# Altium PCB PCB_2021-08-05_00-26-25_2021-08-28_22-46-04.pcbdoc
Units mil, origin at the board's own origin, x right, y up, seen from the top; angles counter-clockwise.
Board outline 2978.51 x 3005 mil, 2 copper layers (Top Layer, Bottom Layer); 27 components, 45 nets, 177 pads, 71 vias.
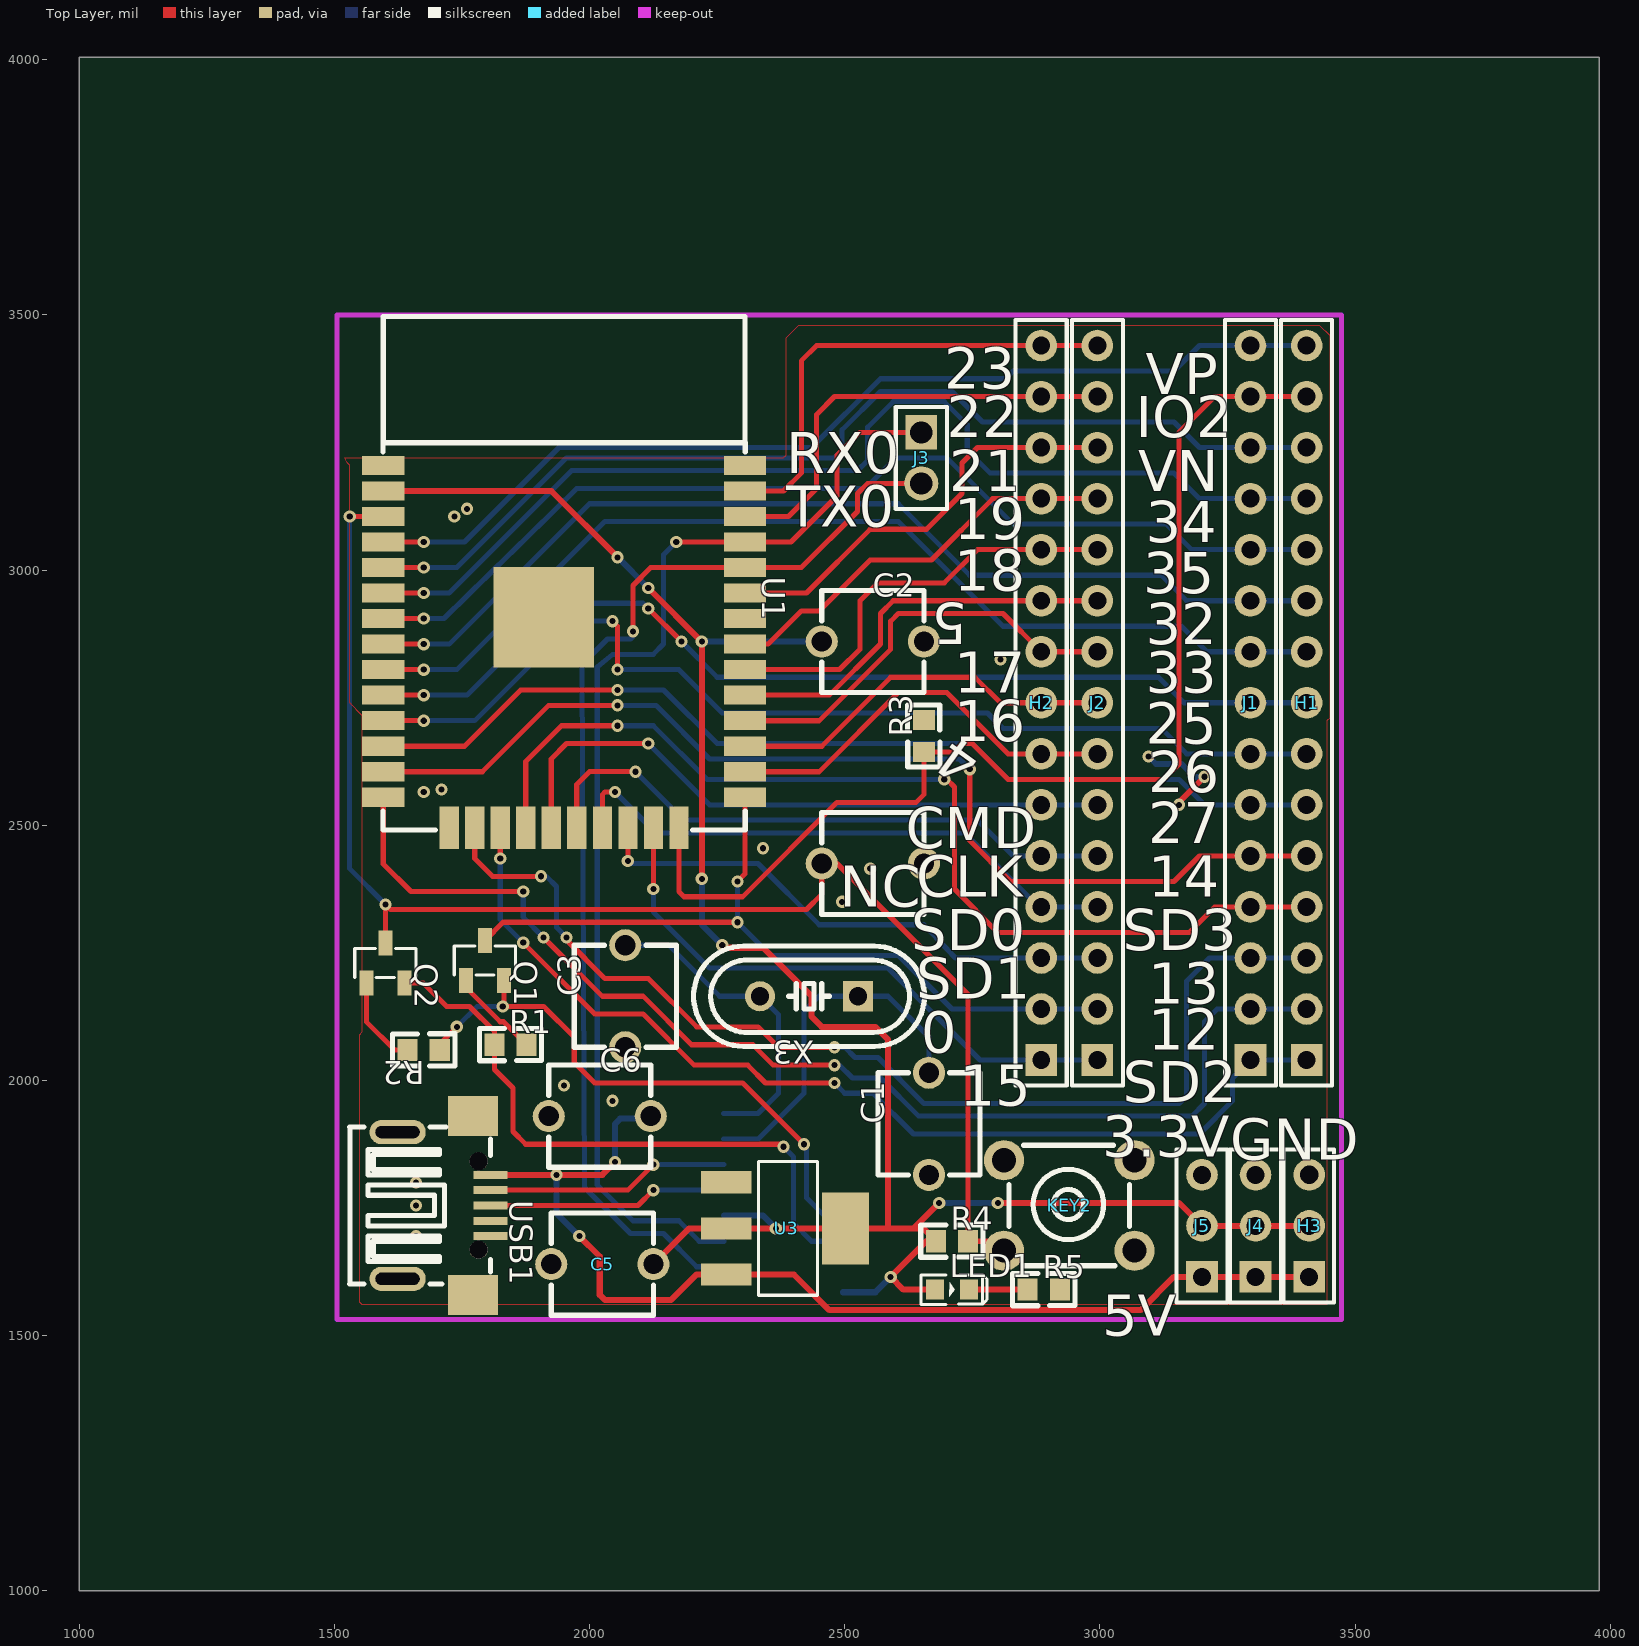
[diagram p0: Top Layer view]
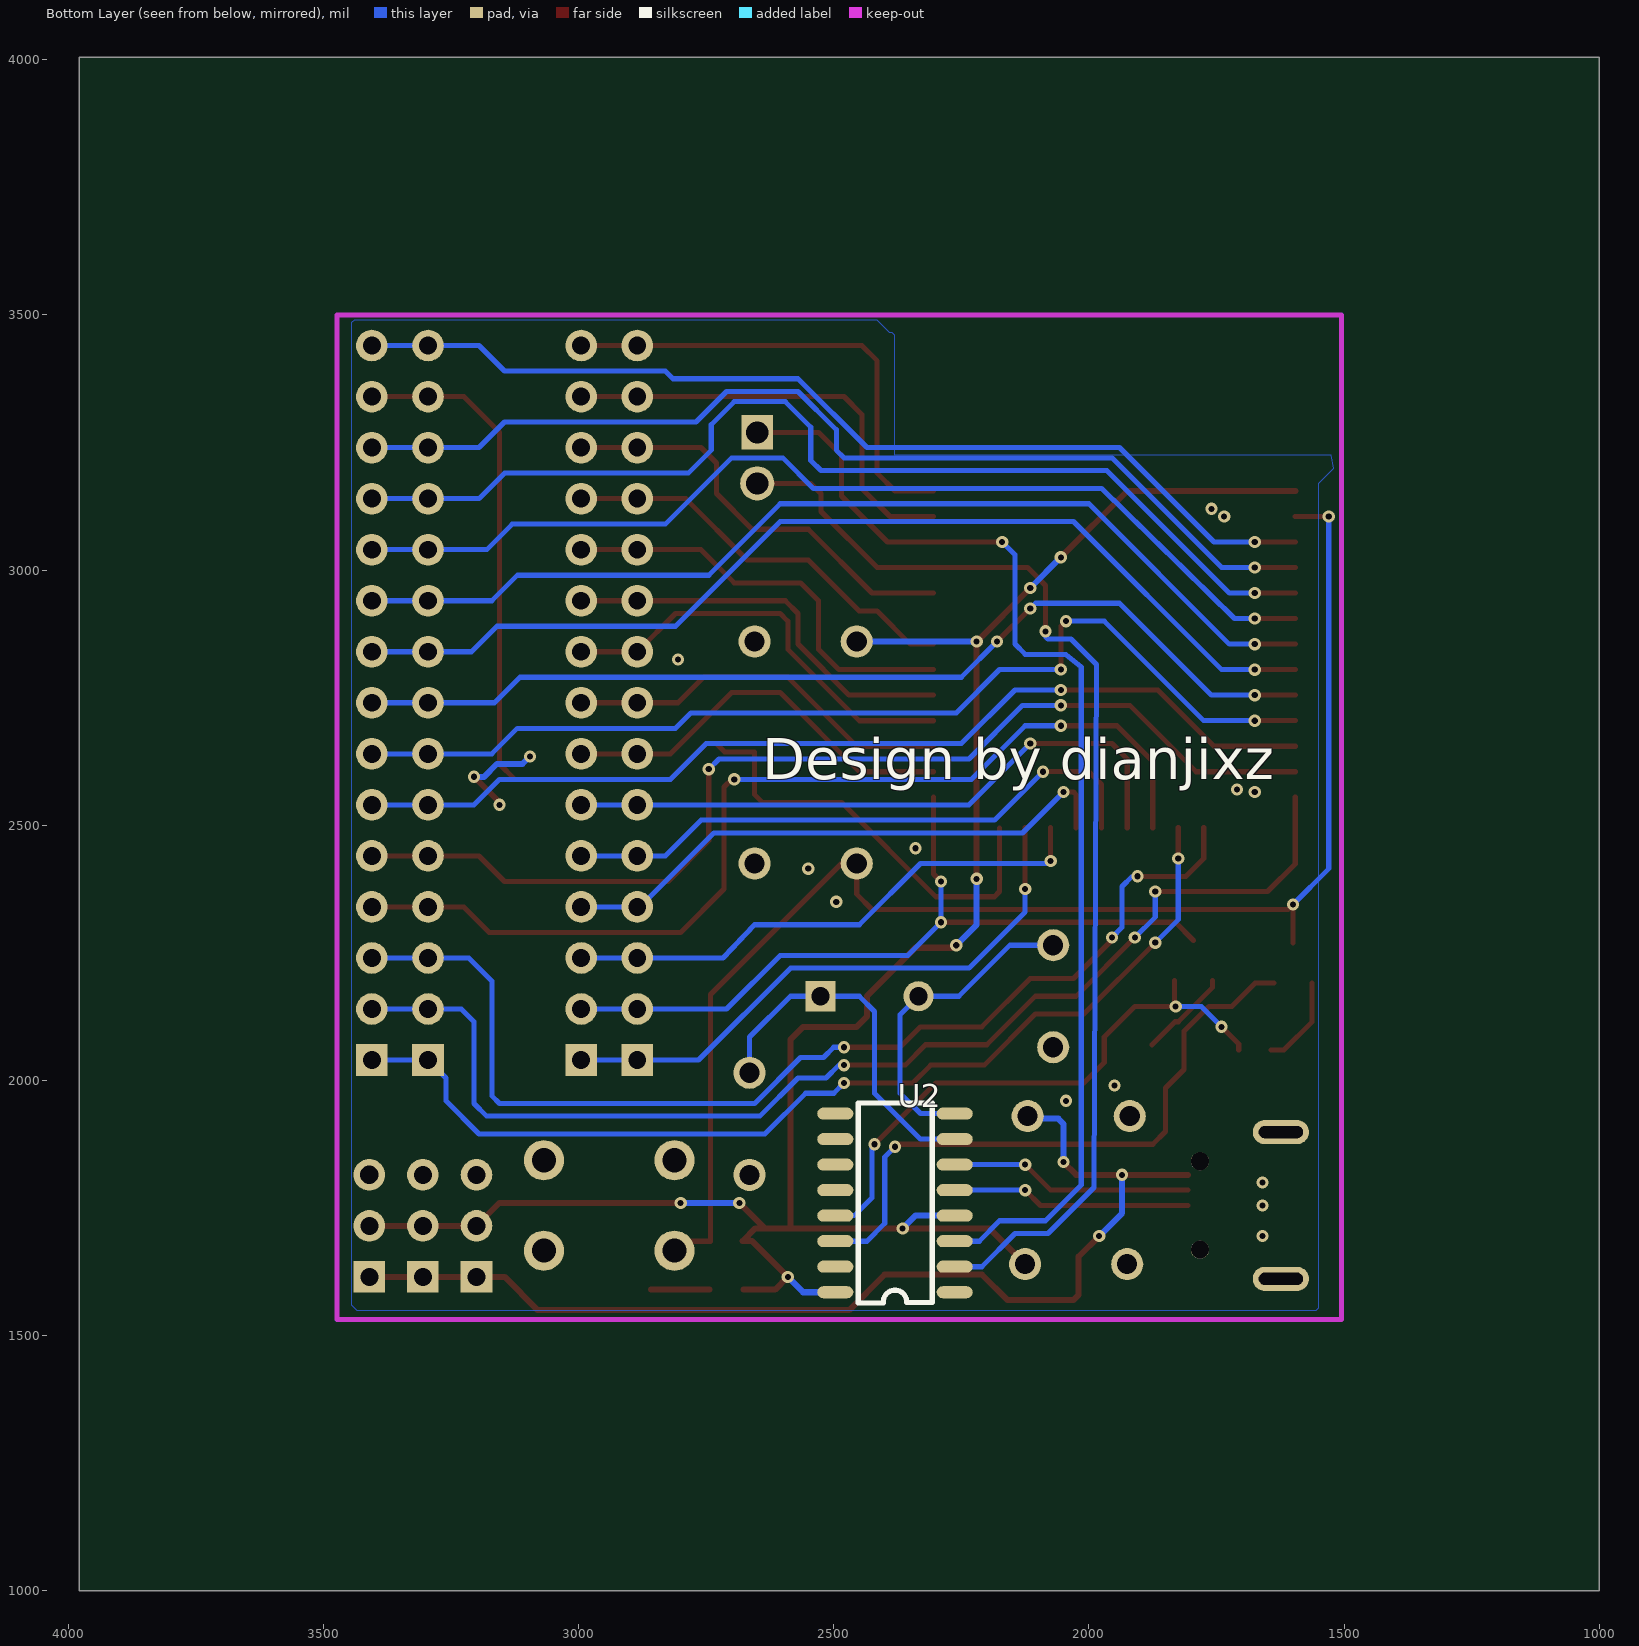
[diagram p1: Bottom Layer view, seen from below]

## Layer stack, top to bottom
Top Layer: signal copper (thickness not stored)
Dielectric: dielectric 12.6, FR-4, Dk 4.8
Bottom Layer: signal copper (thickness not stored)

## Board outline
3978.51,1000 1000,1000 1000,4005 3978.51,4005

## Components (designator, comment, footprint, x,y, rotation, side; value= is the part's Value field where it differs from the comment)
C1 "22pf" CAP-TH_L5.0-W5.0-P5.08-D1.0-L 2665,1915 r90 top
C2 "100nf" CAP-TH_L5.0-W5.0-P5.08-D1.0-L 2555,2860 r0 top
C3 "22pf" CAP-TH_L5.0-W5.0-P5.08-D1.0-L 2070,2165 r90 top
C5 "10uf" CAP-TH_L5.0-W5.0-P5.08-D1.0-L 2025,1640 r180 top
C6 "10uf" CAP-TH_L5.0-W5.0-P5.08-D1.0-L 2020,1930 r0 top
H1 "HDR-F-2.54_1x15" HDR-F-2.54_1X15 3405,2740 r90 top
H2 "HDR-F-2.54_1x15" HDR-F-2.54_1X15 2885,2740 r90 top
H3 "HDR-F-2.54_1x3" HDR-F-2.54_1X3 3410,1715 r90 top
J1 "HDR-M-2.54_1x15" HDR-M-2.54_1X15 3295,2740 r90 top
J2 "HDR-M-2.54_1x15" HDR-M-2.54_1X15 2995,2740 r90 top
J3 "HDR-M-2.54_1x2" HDR-M-2.54_1X2 2650,3220 r270 top
J4 "HDR-M-2.54_1x3" HDR-M-2.54_1X3 3305,1715 r90 top
J5 "HDR-M-2.54_1x3" HDR-M-2.54_1X3 3200,1715 r90 top
KEY2 "K2-6639DP-B4SW-04" KEY-TH_4P-L6.0-W6.0-P4.50-LS7.5 2940,1755 r0 top
LED1 "LED-0603_R" LED0603_RED 2710,1590 r0 top
Q1 "S8050" SOT-23-3_L2.9-W1.3-P1.90-LS2.4-BR 1795,2235 r270 top
Q2 "S8050" SOT-23-3_L2.9-W1.3-P1.90-LS2.4-BR 1600,2230 r270 top
R1 "12k" R0603 1845,2070 r0 top
R2 "12k" R0603 1675,2060 r180 top
R3 "10k" R0603 2655,2675 r90 top
R4 "12k" R0603 2710,1685 r0 top
R5 "100" R0603 2890,1590 r0 top
U1 "ESP32-WROOM-32D" WIFIM-SMD_39P-L25.5-W18.0-P1.27-BL 1950,2850 r270 top
U2 "CH340G" SOIC-16_L9.9-W3.9-P1.27-LS6.0-BR 2380,1760 r0 bottom
U3 "AMS1117-3.3" SOT-223-3_L6.5-W3.4-P2.30-LS7.0-BR 2385,1710 r180 top
USB1 "U-M-M5DS-W-5" USB-SMD_U-M-M5DS-W-5 1715,1755 r270 top
X3 "12MHz" HC-49US_L11.5-W4.5-P4.88 2430,2165 r180 top

## Footprints (in the part's own frame and the unit in brackets; to place one, negate y for a bottom-side part, rotate by r counter-clockwise, add the part's x,y. Pads: shape width x height; smd on the part's side, far side on the other; paste and mask are expansions set on the pad)
CAP-TH_L5.0-W5.0-P5.08-D1.0-L [mm]
  round 1.6 hole 1: 1(-2.54,0) 2(2.54,0)
  silkscreen extent -2.54,-2.54 2.54,2.54
HC-49US_L11.5-W4.5-P4.88 [mm]
  rect 1.5x1.5 hole 0.9: 1(-2.44,0)
  round 1.5 hole 0.9: 2(2.44,0)
  silkscreen extent -5.74,-2.5 5.74,2.5
HDR-F-2.54_1X3 [mil]
  rect 62x62 hole 35: 1(-100,0)
  round 62 hole 35: 2(0,0)
  round 62 hole 36: 3(100,0)
  silkscreen extent -150,-49 150,50
HDR-F-2.54_1X15 [mil]
  rect 62x62 hole 35: 1(-700,0)
  round 62 hole 35: 2(-600,0) 3(-500,0) 4(-400,0) 5(-300,0) 6(-200,0) 7(-100,0) 8(0,0) 9(100,0) 10(200,0) 11(300,0) 12(400,0) 13(500,0) 14(600,0) 15(700,0)
  silkscreen extent -750,-50 750,50
HDR-M-2.54_1X2 [mm]
  rect 1.7x1.575 hole 1.1: 1(-1.27,0)
  round 1.7 hole 1.1: 2(1.27,0)
  silkscreen extent -2.54,-1.27 2.54,1.27
HDR-M-2.54_1X3 [mil]
  rect 62x62 hole 35: 1(-100,0)
  round 62 hole 35: 2(0,0) 3(100,0)
  silkscreen extent -150,-50 150,50
HDR-M-2.54_1X15 [mil]
  rect 62x62 hole 35: 1(-700,0)
  round 62 hole 35: 2(-600,0) 3(-500,0) 4(-400,0) 5(-300,0) 6(-200,0) 7(-100,0) 8(0,0) 9(100,0) 10(200,0) 11(300,0) 12(400,0) 13(500,0) 14(600,0) 15(700,0)
  silkscreen extent -750,-50 750,50
KEY-TH_4P-L6.0-W6.0-P4.50-LS7.5 [mm]
  round 2 hole 1.2: 1(-3.25,-2.25) 2(3.25,-2.25) 3(3.25,2.25) 4(-3.25,2.25)
  silkscreen extent -3,-3 3,3
LED0603_RED [mm]
  rect 0.9x1 smd: 1(-0.85,0) 2(0.85,0)
  silkscreen extent -1.54,-0.73 1.75,0.73
R0603 [mm]
  rect 1x1.1 smd: 1(-0.8,0) 2(0.8,0)
  silkscreen extent -1.55,-0.8 1.55,0.81
SOIC-16_L9.9-W3.9-P1.27-LS6.0-BR [mil]
  oval 70.79x23.62 smd: 1(-117,175) 2(-117,125) 3(-117,75) 4(-117,25) 5(-117,-25) 6(-117,-75) 7(-117,-125) 8(-117,-175) 9(117,-175) 10(117,-125) 11(117,-75) 12(117,-25) 13(117,25) 14(117,75) 15(117,125) 16(117,175)
  silkscreen extent -73,-196 72,196
SOT-23-3_L2.9-W1.3-P1.90-LS2.4-BR [mm]
  rect 1.25x0.7 smd: 1(1,-0.95) 2(1,0.95) 3(-1,0)
  silkscreen extent -0.73,-1.53 0.73,1.53
SOT-223-3_L6.5-W3.4-P2.30-LS7.0-BR [mm]
  rect 2.5x1.1 smd: 1(2.97,-2.3) 2(2.97,0) 3(2.97,2.3)
  rect 2.34x3.6 smd: 4(-2.97,0)
  silkscreen extent -1.57,-3.33 1.37,3.33
USB-SMD_U-M-M5DS-W-5 [mil]
  rect 15.74x66.93 smd: 1(-60,91.14) 2(-30,91.14) 3(0,91.14) 4(30,91.14) 5(60,91.14)
  rect 78.74x98.43 smd: 6(-175.2,56.51) 7(175.2,56.51)
  oval 47.24x110.24 hole 23.62 slot 86.62 at 90 deg copper offset 0,-0.02: 8(-143.7,-91.13) 9(143.7,-91.12)
  round 35.43 hole 35.43 unplated: ""(-86.6,67.56) ""(86.6,67.56)
  silkscreen extent -154,-185 154,91
WIFIM-SMD_39P-L25.5-W18.0-P1.27-BL [mm]
  rect 0.95x2.1 smd: 1(-9.015,-9) 2(-7.745,-9) 3(-6.475,-9) 4(-5.205,-9) 5(-3.935,-9) 6(-2.665,-9) 7(-1.395,-9) 8(-0.125,-9) 9(1.145,-9) 10(2.415,-9) 11(3.685,-9) 12(4.955,-9) 13(6.225,-9) 14(7.495,-9) 25(7.495,9) 26(6.225,9) 27(4.955,9) 28(3.685,9) 29(2.415,9) 30(1.145,9) 31(-0.125,9) 32(-1.395,9) 33(-2.665,9) 34(-3.935,9) 35(-5.205,9) 36(-6.475,9) 37(-7.745,9) 38(-9.015,9)
  rect 2.1x0.95 smd: 15(9.015,-5.715) 16(9.015,-4.445) 17(9.015,-3.175) 18(9.015,-1.905) 19(9.015,-0.635) 20(9.015,0.635) 21(9.015,1.905) 22(9.015,3.175) 23(9.015,4.445) 24(9.015,5.715)
  rect 5x5 smd: 39(-1.472,-1.017)
  silkscreen extent -16.44,-9.02 9.12,9.02

## Free pads (board coordinates)
  round 62.99 hole 39.37: 1(2455,2425) 2(2655,2425)

## Via types
v1: diameter 24, hole 12, Top Layer to Bottom Layer, 71 vias

## Nets (pads, with @x,y where several pads share a name; then routed paths per layer and width w, separated by ;. In a path a pad name is that pad's centre, name@x,y a point inside that pad or via, vN(x,y) a via of type N, cw(c..) or ccw(c..) an arc to the next point about the centre after c; other vN are vias at no path point)
+3.3V: C2.1 C5.1 H3.2 J4.2 J5.2 LED1.1 R4.1 U1.2 U2.4 U2.16 U3.2 U3.4 | length 4355.4
  Top Layer w11.81: U1.2 1925.07,3154.93 v1(2055,3025) ; v1(2115,2965) v1(2220,2860) 2220,2465 v1(2220,2395) ; C5.1 2195,1710 U3.2 U3.4 2653.51,1710 R4.1 2660,1685 v1(2590,1615) 2615,1590 LED1.1 ; v1(2260,2265) 2265,2260 2340,2260 2435,2165 2435,2125 2455,2105 2560,2105 2585,2080 2585,1710 ; 2612.14,1710 2635,1710 v1(2685,1760) ; v1(2800,1760) 3155,1760 J5.2 H3.2 J4.2
  Bottom Layer w11.81: v1(2055,3025) v1(2115,2965) ; v1(2220,2395) 2220,2305 v1(2260,2265) ; v1(2220,2860) C2.1 ; U2.4 2340,1735 v1(2365,1710) ; U2.16 2560,1585 v1(2590,1615) ; v1(2685,1760) v1(2800,1760)
+5V: C6.2 H3.1 J4.1 J5.1 U3.3 USB1.1 | length 2250.9
  Top Layer w11.81: USB1.1@1806.15,1815 2025,1815 v1(2050,1840) ; v1(1980,1695) 2020,1655 2020,1580 2030,1570 2160,1570 2209.45,1619.45 U3.3 2400.55,1619.45 2470,1550 3080,1550 3145,1615 J5.1 H3.1 J4.1
  Bottom Layer w11.81: v1(1935,1815) 1935,1740 v1(1980,1695) ; v1(2050,1840) 2050,1915 2060,1925 2115,1925 C6.2
CH_RX: J3.1 U1.35 U2.3 | length 2282.2
  Top Layer w10: v1(2170,3055) U1.35 2394.9,3054.9 2485,3145 2485,3225 2530,3270 J3.1
  Bottom Layer w10: v1(2170,3055) 2145,3030 2145,2855 2125,2835 2045,2835 2015,2810 2015,1795 2085,1725 2175,1725 2215,1685 U2.3
CH_TX: J3.2 U1.34 U2.2 | length 2251.9
  Top Layer w10: v1(2085,2880) 2085,2970 2120,3005 2143.5,3005 ; 2145,3005 U1.34 2414.9,3004.9 2525,3115 2525,3150 2545,3170 J3.2
  Bottom Layer w10: v1(2085,2880) 2085,2870 2080,2865 2035,2865 1985,2815 1990,1790 2080,1700 2145,1700 2210,1635 U2.2
GND: C1.1 C2.2 C3.1 C5.2 C6.1 H3.3 J4.3 J5.3 KEY2.4 pad.2 R3.2 R5.2 U1.1 U1.15 U1.38 U1.39 U2.1 U3.1 USB1.5 | length 202.3
  Top Layer w11.81: v1(3155,2540) 3155,2545 v1(3205,2595)
  Bottom Layer w11.81: v1(3095,2635) 3110,2620 3160,2620 3185,2595 v1(3205,2595)
  other v1: 1660,1695 1660,1755 1660,1800 2045,1960 1950,1990 2495,2350 2550,2415 2340,2455 1675,2565 1710,2570 2805,2825 1735,3105 1760,3120
GPIO0: H2.2 J2.2 Q1.3 U1.25 | length 1536
  Top Layer w10: Q1.3 1830.6,2310 v1(2290,2310) ; v1(2290,2390) 2304.33,2404.33 U1.25
  Bottom Layer w10: v1(2290,2390) v1(2290,2310) 2355,2245 2605,2245 2710,2140 H2.2 J2.2
GPIO1: H1.15 J1.15 U1.4 | length 1968.8
  Top Layer w10: U1.4 v1(1675,3054.93)
  Bottom Layer w10: v1(1675,3054.93) 1754.9,3054.9 1940,3240 2435,3240 2570,3375 2815,3375 2830,3390 3145,3390 3195,3440 J1.15 H1.15
GPIO2: H1.14 J1.14 R3.1 U1.24 | length 2252.7
  Top Layer w10: U1.24@2175,2495 2175,2370 2185,2360 2300,2360 2485,2545 2640,2545 2655,2560 R3.1 2713.51,2643.51 2730,2660 2750,2660 2820,2590 3125,2590 3155,2620 3155,3270 3225,3340 J1.14 H1.14
GPIO3: H2.3 J2.3 U1.22 | length 1067.6
  Top Layer w10: v1(2075,2430) U1.22
  Bottom Layer w10: v1(2075,2430) 2075,2425 2330,2425 2450,2305 2655,2305 2717,2240 H2.3 J2.3
GPIO4: H2.7 J2.7 U1.26 | length 804.7
  Top Layer w10: U1.26 2449.9,2604.9 2605,2760 2700,2760 2820,2640 H2.7 J2.7
GPIO5: H2.10 J2.10 U1.29 | length 802.5
  Top Layer w10: U1.29 2469.9,2754.9 2570,2855 2570,2915 2595,2940 H2.10 J2.10
GPIO6: H2.4 J2.4 U1.21 | length 1130.2
  Top Layer w10: U1.21 2025,2560 2030,2565 v1(2050,2565)
  Bottom Layer w10: v1(2050,2565) 2130,2485 2735,2485 2880,2340 H2.4 J2.4
GPIO7: H2.5 J2.5 U1.20 | length 1183.6
  Top Layer w10: U1.20 1975,2580 2000,2605 v1(2090,2605)
  Bottom Layer w10: v1(2090,2605) 2185,2510 2760,2510 2830,2440 H2.5 J2.5
GPIO8: H2.6 J2.6 U1.19 | length 1267.1
  Top Layer w10: U1.19 1925,2630 1955,2660 v1(2115,2660)
  Bottom Layer w10: v1(2115,2660) 2235,2540 H2.6 J2.6
GPIO9: H1.4 J1.4 U1.18 | length 1994.5
  Top Layer w10: U1.18 1875,2625 1945,2695 v1(2055,2695) ; v1(2695,2590) 2700,2590 2715,2575 2715,2375 2800,2290 3175,2290 3225,2340 J1.4 H1.4
  Bottom Layer w10: v1(2055,2695) 2125,2695 2230,2590 v1(2695,2590)
GPIO10: H1.1 J1.1 U1.17 | length 2020.5
  Top Layer w10: v1(1825,2435) U1.17 ; v1(1870,2270) 2010,2130 2105,2130 2205,2030 2310,2030 2345,1995 v1(2480,1995)
  Bottom Layer w10: v1(1825,2435) 1825,2315 v1(1870,2270) ; v1(2480,1995) 2500,1975 2555,1975 2635,1895 3195,1895 3260,1960 3260,2005 J1.1 H1.1
GPIO11: H1.9 J1.9 U1.9 | length 2035.1
  Top Layer w10: U1.9 v1(1675,2804.93)
  Bottom Layer w10: v1(1675,2804.93) 1739.9,2804.9 2030,3095 2605,3095 2810,2890 3160,2890 3210,2840 J1.9 H1.9
GPIO12: H1.2 J1.2 U1.14 | length 2354.7
  Top Layer w10: U1.14 1595.68,2424.32 1650,2370 v1(1870,2370) ; v1(1910,2280) 2025,2165 2105,2165 2200,2070 2320,2070 2360,2030 v1(2480,2030)
  Bottom Layer w10: v1(1870,2370) 1870,2320 v1(1910,2280) ; v1(2480,2030) 2490,2030 2515,2005 2570,2005 2645,1930 3180,1930 3205,1955 3205,2115 3230,2140 J1.2 H1.2
GPIO13: H1.3 J1.3 U1.16 | length 2188.5
  Top Layer w10: U1.16 1775,2435 1810,2400 v1(1905,2400) ; v1(1955,2280) 1955,2275 2030,2200 2115,2200 2210,2105 2330,2105 2370,2065 v1(2480,2065)
  Bottom Layer w10: v1(1905,2400) 1915,2400 1935,2380 1935,2300 v1(1955,2280) ; v1(2480,2065) 2500,2065 2520,2045 2565,2045 2655,1955 3155,1955 3170,1970 3170,2195 3215,2240 J1.3 H1.3
GPIO14: H1.5 J1.5 U1.13 | length 2108.8
  Top Layer w10: U1.13 1789.93,2604.93 1920,2735 v1(2055,2735) ; v1(2745,2610) 2745,2470 2825,2390 3145,2390 3195,2440 J1.5 H1.5
  Bottom Layer w10: v1(2055,2735) 2130,2735 2235,2630 2725,2630 v1(2745,2610)
GPIO15: H2.1 J2.1 U1.23 | length 1155.2
  Top Layer w10: v1(2125,2375) U1.23
  Bottom Layer w10: v1(2125,2375) 2125,2330 2235,2220 2585,2220 2765,2040 H2.1 J2.1
GPIO16: H2.8 J2.8 U1.27 | length 767.3
  Top Layer w10: U1.27 2454.93,2654.93 2590,2790 2755,2790 2805,2740 J2.8
GPIO17: H2.9 J2.9 U1.28 | length 841
  Top Layer w10: U1.28 2449.9,2704.9 2590,2845 2590,2900 2605,2915 2810,2915 H2.9 J2.9
GPIO18: H2.11 J2.11 U1.30 | length 843.7
  Top Layer w10: U1.30 2490,2805 2530,2845 2530,2940 2565,2975 2695,2975 2760,3040 H2.11 J2.11
GPIO19: H2.12 J2.12 U1.31 | length 808.8
  Top Layer w10: U1.31 2349.9,2854.9 2415,2920 2450,2920 2550,3020 2670,3020 2790,3140 H2.12 J2.12
GPIO20: H1.10 J1.10 U1.8 | length 2002
  Top Layer w10: U1.8 v1(1675,2854.93)
  Bottom Layer w10: v1(1675,2854.93) 1724.9,2854.9 2000,3130 2605,3130 2745,2990 3120,2990 3170,2940 J1.10 H1.10
GPIO21: H2.13 J2.13 U1.33 | length 843.9
  Top Layer w10: U1.33 2424.93,2954.93 2550,3080 2660,3080 2730,3150 2730,3210 2760,3240 H2.13 J2.13
GPIO22: H2.14 J2.14 U1.36 | length 879.2
  Top Layer w10: U1.36 2389.93,3104.93 2445,3160 2445,3305 2480,3340 H2.14 ; H2.14@2878.77,3340 J2.14
GPIO23: H2.15 J2.15 U1.37 | length 937.6
  Top Layer w10: U1.37 2379.93,3154.93 2415,3190 2415,3410 2445,3440 H2.15 J2.15
GPIO24: H1.11 J1.11 U1.7 | length 2012.9
  Top Layer w10: U1.7 v1(1675,2904.93)
  Bottom Layer w10: v1(1675,2904.93) 1714.9,2904.9 1975,3160 2540,3160 2600,3220 2700,3220 2830,3090 3130,3090 3180,3040 J1.11 H1.11
GPIO25: H1.8 J1.8 U1.10 | length 1964.7
  Top Layer w10: U1.10 v1(1675,2754.93) ; v1(2115,2925) v1(2180,2860)
  Bottom Layer w10: v1(1675,2754.93) 1759.9,2754.9 1940,2935 2105,2935 v1(2115,2925) ; v1(2180,2860) 2250,2790 3115,2790 3165,2740 J1.8 H1.8
GPIO26: H1.7 J1.7 U1.11 | length 2047.6
  Top Layer w10: U1.11 v1(1675,2704.93) ; v1(2045,2900) 2055,2890 v1(2055,2805)
  Bottom Layer w10: v1(1675,2704.93) 1774.93,2704.93 1970,2900 v1(2045,2900) ; v1(2055,2805) 2175,2805 2260,2720 2780,2720 2810,2690 3120,2690 3170,2640 J1.7 H1.7
GPIO27: H1.6 J1.6 U1.12 | length 1948.1
  Top Layer w10: U1.12 1754.9,2654.9 1865,2765 v1(2055,2765)
  Bottom Layer w10: v1(2055,2765) 2145,2765 2250,2660 2750,2660 2820,2590 3155,2590 3205,2540 J1.6 H1.6
GPIO28: H1.12 J1.12 U1.6 | length 2110.8
  Top Layer w10: U1.6 v1(1675,2954.93)
  Bottom Layer w10: v1(1675,2954.93) 1724.9,2954.9 1965,3195 2525,3195 2545,3215 2545,3280 2595,3330 2695,3330 2740,3285 2740,3235 2785,3190 3145,3190 3195,3140 J1.12 H1.12
GPIO29: H1.13 J1.13 U1.5 | length 2021.3
  Top Layer w10: U1.5 v1(1675,3004.93)
  Bottom Layer w10: v1(1675,3004.93) 1739.9,3004.9 1955,3220 2480,3220 2495,3235 2495,3275 2570,3350 2710,3350 2770,3290 3145,3290 3195,3240 J1.13 H1.13
LED1_2: LED1.2 R5.1 | length 115
  Top Layer w11.81: LED1.2 R5.1
NRST: KEY2.1 pad.1 Q2.3 R4.2 U1.3 | length 2816.4
  Top Layer w10: v1(1530,3105) 1595.61,3105 U1.3 ; Q2.3 v1(1600,2345) 1610,2335 2425,2335 2455,2365 pad.1 2485,2425 2741.5,2168.5 R4.2 2793.47,1685 KEY2.1
  Bottom Layer w10: v1(1530,3105) 1530,2415 v1(1600,2345)
Q1_1: Q1.1 R1.2 | length 178.7
  Top Layer w10: Q1.1 1757.6,2182.4 1825,2115 1831.5,2115 R1.2
Q2_1: Q2.1 R2.2 | length 179.3
  Top Layer w10: Q2.1 1562.6,2115 1617.6,2060 R2.2
U2_5: U2.5 USB1.3 | length 469.3
  Top Layer w10: USB1.3 2095,1755 v1(2125,1785)
  Bottom Layer w10: v1(2125,1785) U2.5
U2_6: U2.6 USB1.2 | length 477.6
  Top Layer w10: USB1.2 2075,1785 v1(2125,1835)
  Bottom Layer w10: v1(2125,1835) U2.6
U2_7: C1.2 U2.7 X3.1 | length 714.8
  Bottom Layer w10: U2.7 2330,1885 2420,1975 2420,2135 2450,2165 X3.1 2585,2165 2665,2085 C1.2
U2_8: C3.2 U2.8 X3.2 | length 633.9
  Bottom Layer w10: C3.2 2155,2265 2255,2165 X3.2 2370,2128.94 2370,1975 2330,1935 U2.8
U2_13: Q1.2 R2.1 U2.13 | length 1141.8
  Top Layer w10: R2.1 1706.49,2071.49 v1(1740,2105) ; Q1.2 1832.4,2147.4 v1(1830,2145) 1910,2145 1970,2085 1970,2035 2010,1995 2300,1995 v1(2420,1875)
  Bottom Layer w10: v1(1740,2105) 1780,2145 v1(1830,2145) ; v1(2420,1875) 2425,1870 2425,1770 2460,1735 U2.13
U2_14: Q2.2 R1.1 U2.14 | length 1241.8
  Top Layer w10: Q2.2 1674.37,2190.63 1720,2145 1765,2145 1813.51,2096.49 R1.1 1813.5,2021.5 1850,1985 1850,1900 1875,1875 2380,1875 v1(2380,1870)
  Bottom Layer w10: v1(2380,1870) 2400,1850 2400,1720 2435,1685 U2.14
pads on no net: KEY2.2 KEY2.3 U1.32 U2.9 U2.10 U2.11 U2.12 U2.15 USB1. USB1.4 USB1.6 USB1.7 USB1.8 USB1.9

## Polygon pours and split planes (outlines as drawn)
GND on Top Layer (solid): 1520,3220 2380,3220 2385,3225 2385,3455 2410,3480 3430,3480 3450,3460 3450,3085 3450,2710 3445,2705 3445,1940 3445,1560 2345,1560 1555,1560 1550,1565 1550,2090 1555,2095 1555,2715 1530,2740 1530,3205 1525,3210 1520,3220
GND on Bottom Layer (solid): 1525,3225 2380,3225 2380,3460 2385,3465 2390,3465 2415,3490 3440,3490 3445,3485 3445,1560 3435,1550 1555,1550 1550,1555 1550,3170 1520,3200

## Silkscreen, mask and mechanical layers (free items; w line width, h text height)
Top Overlay:
  lines w10: 2455,2384.4 2455,2325 2655,2325 2655,2384.4 ; 2455,2465.6 2455,2525 2655,2525 2655,2465.6
  text "23" at 2695,3355 h80
  text "VP" at 3090,3345 h80
  text "22" at 2700,3260 h80
  text "IO2" at 3070,3260 h80
  text "RX0" at 2385,3190 h80
  text "21" at 2705,3155 h80
  text "VN" at 3075,3155 h80
  text "TX0" at 2385,3085 h80
  text "19" at 2715,3060 h80
  text "34" at 3090,3055 h80
  text "18" at 2715,2960 h80
  text "35" at 3085,2955 h80
  text "5" at 2740,2935 h80 r180
  text "32" at 3090,2855 h80
  text "17" at 2715,2760 h80
  text "33" at 3090,2760 h80
  text "16" at 2715,2665 h80
  text "25" at 3090,2660 h80
  text "4" at 2773.51,2637.36 h80 r144
  text "26" at 3095,2565 h80
  text "27" at 3095,2465 h80
  text "CMD" at 2620,2455 h80
  text "CLK" at 2640,2360 h80
  text "14" at 3095,2360 h80
  text "NC" at 2490,2340 h80
  text "SD0" at 2630,2255 h80
  text "SD3" at 3045,2255 h80
  text "SD1" at 2640,2160 h80
  text "13" at 3095,2150 h80
  text "0" at 2720,2135 h80 r180
  text "12" at 3095,2060 h80
  text "SD2" at 3045,1957.16 h80
  text "15" at 2725,1950 h80
  text "3.3V" at 3005,1850 h80
  text "GND" at 3255,1845 h80
  text "5V" at 3005,1500 h80
Bottom Overlay:
  text "Design by dianjixz" at 2640,2590 h80
Mechanical 4:
  region: 2456.57,2326.57 2456.57,2523.43 2653.43,2523.43 2653.43,2326.57
Mechanical 5:
  region: 2594.37,2454.53 ccw(c2594.37,2425) 2594.37,2395.47 2653.43,2395.47 ccw(c2653.25,2425) 2653.43,2454.53 2594.37,2454.53
  region: 2515.63,2395.47 2515.63,2454.53 cw(c2486.1,2454.7) 2456.57,2454.53 ccw(c2456.75,2425) 2456.57,2395.47